# EAGLE board NQSMHS-2 (EAGLE 5.11)
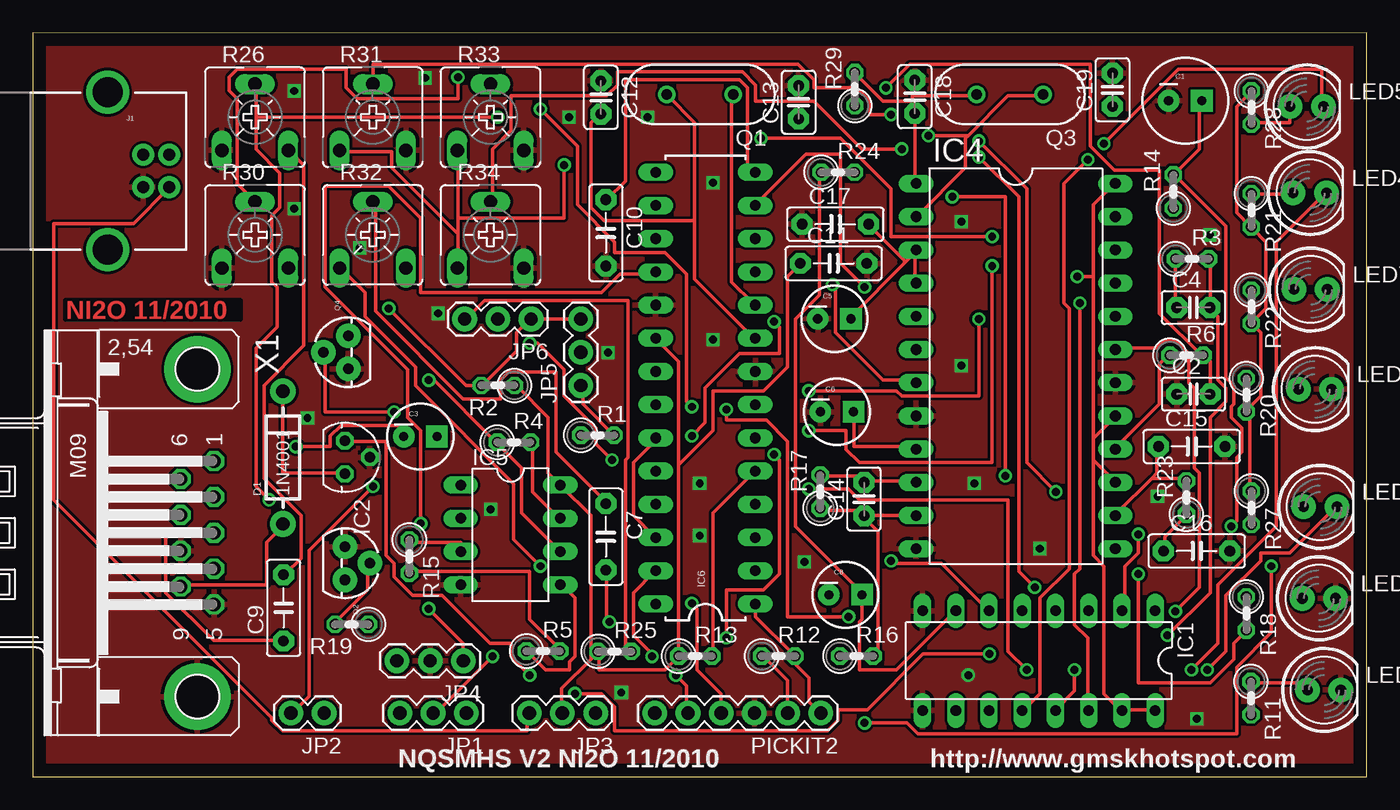
[diagram p0: board, top side]
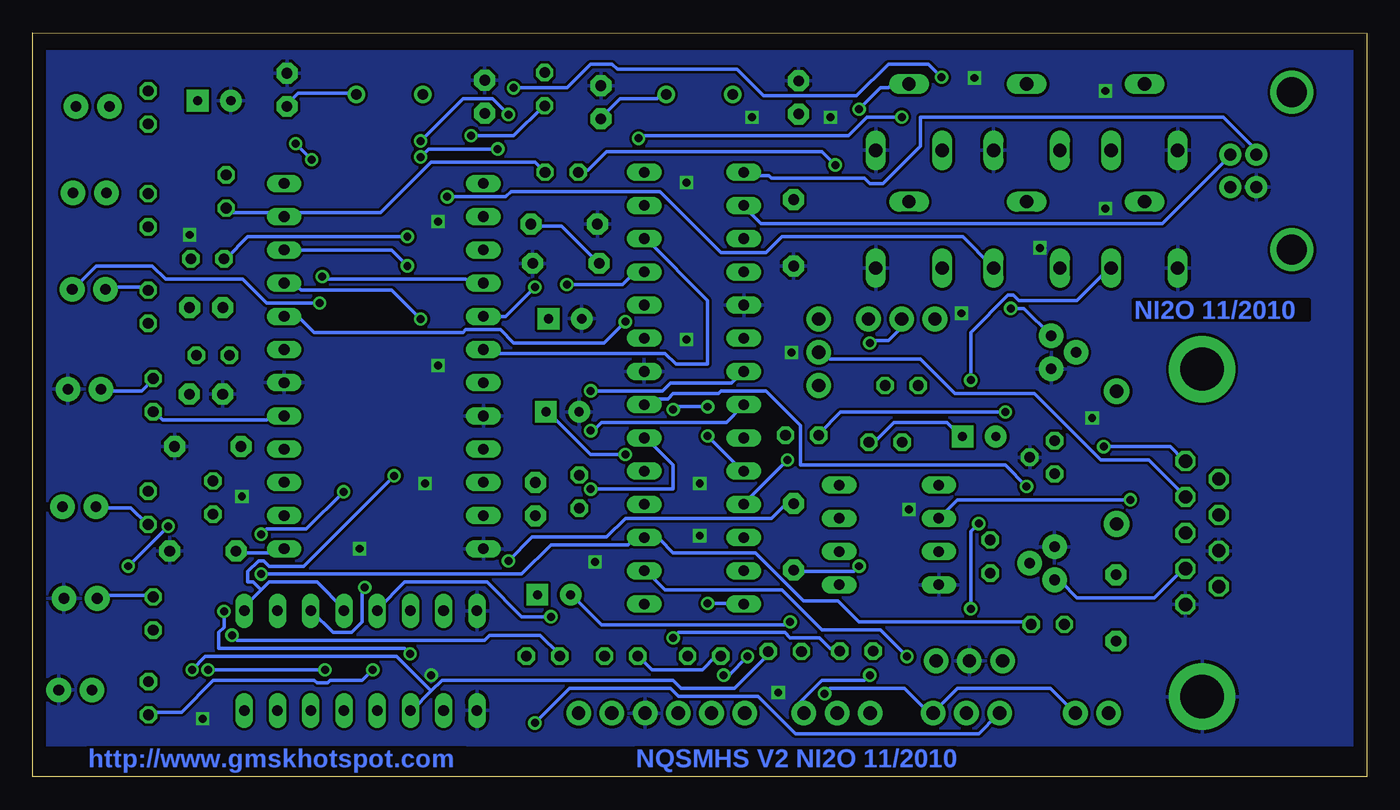
[diagram p1: board, bottom side, seen from below]

Size 102 x 56.92 mm. Coordinates in mm from the lower left corner, seen from the top.
Outline: 0,0 102,0 102,56.92 0,56.87 0,0
Copper layers (1*16): Top 0.035mm / dielectric 1.5mm / Bottom 0.035mm
Design rules "default": minimum track width 10mil, minimum drill 24mil, track to track 8mil, track to pad 8mil, pad to pad 8mil, via to via 8mil, smd to smd 8mil, copper to edge 40mil, drill to drill 8mil, minimum pad ring 10mil, minimum via ring 8mil, stop-mask expansion 4mil, vias tented up to drill 0mil, thermal gap 10mil

## Footprints (pad centres in the part's own frame; a part is rotated, then mirrored left to right if it is on the bottom)
CPOL-RADIAL-100UF-25V = drill 0.7 pad 1.651 square: 1 1.27,0 | drill 0.7 pad 1.651 round: 2 -1.27,0
C2.5-2 = drill 0.813 pad 1.6 octagon: 1 -1.27,0; 2 1.27,0
CPOL-RADIAL-10UF-25V = drill 0.7 pad 1.651 square: 1 1.27,0 | drill 0.7 pad 1.651 round: 2 -1.27,0
C5B2.5 = drill 0.813 pad 1.6 octagon: 1 -2.54,0; 2 2.54,0
DIODE-1N4001 = drill 1 pad 1.981 round: A -5.08,0; C 5.08,0
DIL16 = drill 0.813 long: 1 -8.89,-3.81; 2 -6.35,-3.81; 3 -3.81,-3.81; 4 -1.27,-3.81; 5 1.27,-3.81; 6 3.81,-3.81; 7 6.35,-3.81; 8 8.89,-3.81; 9 8.89,3.81; 10 6.35,3.81; 11 3.81,3.81; 12 1.27,3.81; 13 -1.27,3.81; 14 -3.81,3.81; 15 -6.35,3.81; 16 -8.89,3.81
78LXX = drill 0.813 octagon: GND 0,1.905; IN 1.27,0; OUT -1.27,0
DIL24-6 = drill 0.813 long: 1 -13.97,-7.62; 2 -11.43,-7.62; 3 -8.89,-7.62; 4 -6.35,-7.62; 5 -3.81,-7.62; 6 -1.27,-7.62; 7 1.27,-7.62; 8 3.81,-7.62; 9 6.35,-7.62; 10 8.89,-7.62; 11 11.43,-7.62; 12 13.97,-7.62; 13 13.97,7.62; 14 11.43,7.62; 15 8.89,7.62; 16 6.35,7.62; 17 3.81,7.62; 18 1.27,7.62; 19 -1.27,7.62; 20 -3.81,7.62; 21 -6.35,7.62; 22 -8.89,7.62; 23 -11.43,7.62; 24 -13.97,7.62
DIL08 = drill 0.813 long: 1 -3.81,-3.81; 2 -1.27,-3.81; 3 1.27,-3.81; 4 3.81,-3.81; 5 3.81,3.81; 6 1.27,3.81; 7 -1.27,3.81; 8 -3.81,3.81
DIL28-3 = drill 0.813 long: 1 -16.51,-3.81; 2 -13.97,-3.81; 3 -11.43,-3.81; 4 -8.89,-3.81; 5 -6.35,-3.81; 6 -3.81,-3.81; 7 -1.27,-3.81; 8 1.27,-3.81; 9 3.81,-3.81; 10 6.35,-3.81; 11 8.89,-3.81; 12 11.43,-3.81; 13 13.97,-3.81; 14 16.51,-3.81; 15 16.51,3.81; 16 13.97,3.81; 17 11.43,3.81; 18 8.89,3.81; 19 6.35,3.81; 20 3.81,3.81; 21 1.27,3.81; 22 -1.27,3.81; 23 -3.81,3.81; 24 -6.35,3.81; 25 -8.89,3.81; 26 -11.43,3.81; 27 -13.97,3.81; 28 -16.51,3.81
USB-B-PTH = drill 0.914 pad 1.676 round: D+ 0,1.25; D- 1.981,1.25; GND 0,-1.25; VBUS 1.981,-1.25 | drill 2.286 round: P$1 -2.718,-6.02; P$2 -2.718,6.02
1X03 = drill 1.016 pad 1.88 round: 1 0,0; 2 2.54,0; 3 5.08,0
1X02 = drill 1.016 pad 1.88 round: 1 0,0; 2 2.54,0
LED5MM = drill 0.813 pad 1.88 round: A -1.27,0; K 1.27,0
1X06 = drill 1.016 pad 1.88 round: 1 0,0; 2 2.54,0; 3 5.08,0; 4 7.62,0; 5 10.16,0; 6 12.7,0
HC49US = drill 0.813 round: 1 -2.54,0; 2 2.54,0
TO-92 = drill 0.813 pad 1.88 round: 1 -1.27,0; 2 0,1.905; 3 1.27,0
0207/2V = drill 0.813 octagon: 1 -1.27,0; 2 1.27,0
CA6V = drill 1.016 long: A -2.54,-2.54; E 2.54,-2.54; S 0,2.54
M09HP = drill 1.016 octagon: 1 -5.486,1.27; 2 -2.743,1.27; 3 0,1.27; 4 2.743,1.27; 5 5.486,1.27; 6 -4.115,-1.27; 7 -1.372,-1.27; 8 1.372,-1.27; 9 4.115,-1.27 | drill 3.302 pad 5.08 round: G1 -12.522,0; G2 12.522,0

## Placement (x,y rotation side)
C1  10uF  [CPOL-RADIAL-100UF-25V]  88.12,51.72 0 top
C2  22pF  [C2.5-2]  88.75,29.28 0 top
C3  4.7uF  [CPOL-RADIAL-10UF-25V]  29.64,26.04 0 top
C4  330p  [C2.5-2]  88.74,35.9 0 top
C5  47uF  [CPOL-RADIAL-10UF-25V]  61.29,35.04 0 top
C6  1uF  [CPOL-RADIAL-10UF-25V]  61.49,27.93 0 top
C7  0.1uF  [C5B2.5]  43.82,18.37 270 top
C8  10uF  [CPOL-RADIAL-10UF-25V]  62.14,13.93 0 top
C9  0.1uF  [C5B2.5]  19.18,12.93 90 top
C10  0.1uF  [C5B2.5]  43.82,41.61 270 top
C11  0.1uF  [C5B2.5]  61.23,39.28 0 top
C12  22pF  [C2.5-2]  43.44,51.97 270 top
C13  22pF  [C2.5-2]  58.56,51.6 90 top
C14  22pF  [C2.5-2]  63.56,21.25 90 top
C15  0.1uF  [C5B2.5]  88.61,25.28 0 top
C16  0.1uF  [C5B2.5]  88.99,17.28 0 top
C17  0.1uF  [C5B2.5]  61.37,42.28 0 top
C18  22pF  [C2.5-2]  67.44,52.02 270 top
C19  22pF  [C2.5-2]  82.56,52.55 90 top
D1  1N4001  [DIODE-1N4001]  19.13,24.42 90 top
IC1  MAX8213  [DIL16]  76.93,8.9 180 top
IC2  78L05  [78LXX]  23.87,24.45 270 top
IC4  CMX589PA4  [DIL24-6]  75.16,31.42 270 top
IC5  LM4558  [DIL08]  36.53,18.51 270 top
IC6  PIC18F2550  [DIL28-3]  51.44,29.74 90 top
J1  USBPTH  [USB-B-PTH]  8.45,46.35 0 top
JP1  SW4  [1X03]  33.15,4.88 180 top
JP2  SW3  [1X02]  22.28,4.88 180 top
JP3  SW1  [1X03]  43.04,4.88 180 top
JP4  SERIAL  [1X03]  32.93,8.88 180 top
JP5  SW5  [1X03]  41.91,29.94 90 top
JP6  SW6  [1X03]  38.1,35.02 180 top
LED1  COS  [LED5MM]  98.74,6.66 0 top
LED2  PWR  [LED5MM]  98.04,29.66 0 top
LED3  PTT  [LED5MM]  98.34,13.66 0 top
LED4  MED  [LED5MM]  97.64,44.66 0 top
LED5  LOW  [LED5MM]  97.41,51.28 0 top
LED6  DCOS  [LED5MM]  98.44,20.66 0 top
LED7  HIGH  [LED5MM]  97.71,37.28 0 top
PICKIT2  PICKIT2  [1X06]  60.26,4.88 180 top
Q1  24MHz  [HC49US]  51.02,52.2 180 top
Q2  2N3904  [TO-92]  23.87,16.34 270 top
Q3  4.9152MHz  [HC49US]  74.72,52.2 180 top
Q4  2N3904  [TO-92]  24.13,32.48 90 top
R1  4K7  [0207/2V]  43.18,26.13 0 top
R2  47K  [0207/2V]  35.56,29.94 180 top
R3  180K  [0207/2V]  88.64,39.63 0 top
R4  47K  [0207/2V]  36.79,25.6 0 top
R5  510K  [0207/2V]  39.02,9.63 0 top
R6  100K  [0207/2V]  88.22,32.25 0 top
R11  47K  [0207/2V]  93.14,6.02 270 top
R12  10K  [0207/2V]  57.01,9.25 0 top
R13  47K  [0207/2V]  50.66,9.25 0 top
R14  27K  [0207/2V]  87.21,44.77 90 top
R15  510K  [0207/2V]  28.79,16.86 270 top
R16  100K  [0207/2V]  62.98,9.25 0 top
R17  100K  [0207/2V]  60.21,21.82 90 top
R18  1K  [0207/2V]  92.79,12.5 270 top
R19  4K7  [0207/2V]  24.39,11.67 180 top
R20  1K  [0207/2V]  92.79,29.2 270 top
R21  470R  [0207/2V]  93.17,43.34 270 top
R22  470R  [0207/2V]  93.17,35.96 270 top
R23  1M  [0207/2V]  88.21,21.37 90 top
R24  27K  [0207/2V]  61.56,46.25 0 top
R25  47K  [0207/2V]  44.49,9.6 0 top
R26  500K  [CA6V]  17,50.46 0 top
R27  470R  [0207/2V]  93.17,20.58 270 top
R28  470R  [0207/2V]  93.17,51.2 270 top
R29  1M  [0207/2V]  62.86,52.6 90 top
R30  500K  [CA6V]  17,41.46 0 top
R31  100K  [CA6V]  26,50.46 0 top
R32  10K  [CA6V]  26,41.46 0 top
R33  100K  [CA6V]  35,50.46 0 top
R34  100K  [CA6V]  35,41.46 0 top
X1  DB9M  [M09HP]  12.59,18.67 270 top

## Library data of the parts
C1 C3 C5 C6 C8 D1 IC6 J1 JP1-JP6 LED1-LED7 PICKIT2 Q1-Q4 = SparkFun
C2 C4 C7 C9-C19 = capacitor-wima
IC1 IC4 = ic-package
IC2 = v-reg
IC5 = linear
R1-R6 R11-R25 R27-R29 = resistor
R26 R30-R34 = pot
X1 = con-subd

## Nets
+5V: J1.VBUS JP3.3
+12V: D1.A X1.9
ACOS: JP5.3 JP6.1 Q4.3 R2.2
COS: IC6.25 JP6.2
COS/COR/SQL: JP5.2 X1.2
DCOS: IC1.11 JP6.3 LED6.K R25.2
GND: C1.2 C2.1 C5.2 C6.2 C10.2 C11.2 C12.1 C13.2 C15.2 C16.2 C17.1 C18.1 C19.2 IC1.8 IC1.9 IC2.GND IC4.8 IC4.12 IC4.18 IC5.4 IC6.8 IC6.19 J1.GND JP4.2 LED1.K LED2.K LED3.K PICKIT2.3 Q2.1 Q4.1 R26.A R30.A R31.E R33.E R34.E X1.5 X1.8 X1.G2
N$2: D1.C IC2.IN
N$3: IC6.23 IC6.26
N$4: IC6.5 R13.2
N$5: IC6.6 R11.2
N$6: LED1.A R11.1
N$7: IC6.7 JP2.2
N$8: C1.1 JP1.3 R14.2
N$9: C12.2 IC6.9 Q1.2
N$10: C13.1 IC6.10 Q1.1
N$11: C10.1 IC6.14
N$12: IC2.OUT JP3.1
N$13: LED2.A R20.1
N$14: Q2.2 R19.2
N$15: C4.2 R3.2 R16.1
N$16: LED3.A R18.1
N$17: IC5.3 R15.1
N$18: C4.1 IC5.2 R3.1 R26.S
N$19: IC5.6 R4.1 R30.E
N$20: C9.2 R26.E
N$21: C2.2 R6.2 R30.S
N$22: C3.1 IC5.7 R4.2
N$23: C8.1 IC1.7 R24.1 R31.A R33.A R34.A
N$24: IC5.5 R5.1
N$25: C7.1 IC1.6 R32.S
N$26: C7.2 C8.2 R32.A
N$27: IC1.1 IC1.4 R32.E
N$28: IC1.14 LED7.K
N$29: LED7.A R22.1
N$30: IC1.13 LED4.K
N$31: LED4.A R21.1
N$32: IC1.12 LED5.K
N$33: IC1.2 R31.S
N$34: LED6.A R27.2
N$35: LED5.A R28.2
N$36: IC1.5 R33.S
N$37: JP5.1 R1.2
N$38: C18.2 IC4.1 Q3.2 R29.2
N$39: IC1.3 R34.S
N$40: X1.7
N$41: X1.6
N$42: C16.1 IC4.13 R23.1
N$43: C15.1 IC4.14 R23.2
N$44: Q4.2 R1.1
N$59: C19.1 IC4.2 Q3.1 R29.1
PGC: IC6.27 PICKIT2.5
PGD: IC6.28 PICKIT2.4
PLLACQ: IC4.7 IC6.11
PTT: IC6.3 R18.2 R19.1
RCFB: C14.2 IC4.10 R17.2
RX-232: IC6.18 JP4.1
RXCLOCK: IC4.21 IC6.21
RXDATA: IC4.20 IC6.24
RXDATA/SPKR: C9.1 X1.3
RXDCACQ: IC4.6 IC6.12
RXHOLD: IC4.5 IC6.13
RXSIGIN: C14.1 IC4.11 R16.2 R17.1
RXSN: IC4.23 R14.1 R24.2
TRXPTT: Q2.3 X1.4
TX-232: IC6.17
TX/SN: IC6.2 JP1.2
TXCLOCK: IC4.22 IC6.22
TXDATA: IC4.19 JP1.1 JP2.1
TXDATA/MIC: C3.2 X1.1
TXOUT: IC4.16 R6.1
USB+: IC6.16 J1.D-
USB-: IC6.15 J1.D+
VBIAS: C6.1 IC4.9 R5.2 R15.2
VCC: C5.1 C11.1 C17.2 IC1.15 IC1.16 IC4.3 IC4.4 IC4.15 IC4.17 IC4.24 IC5.8 IC6.20 JP3.2 PICKIT2.2 R2.1 R12.1 R13.1 R20.2 R21.2 R22.2 R25.1 R27.1 R28.1
VPP: IC6.1 PICKIT2.1 R12.2

## Tracks (layer width: path | path; a pad name or v marks a point on that pad's centre or on a via)
+5V
  Top 0.254: J1.VBUS 10.36,44.98 7.72,42.34 1.63,42.34 1.63,21.2 18.29,4.54 18.29,4.34 19.1,3.52 37.8,3.52 37.8,4.74 JP3.3
+12V
  Top 0.254: X1.9 11.38,14.7 17.88,14.7 17.88,17.95 19.1,19.17 D1.A
ACOS  (via drill 0.61)
  Top 0.254: v27.23,35.83 33.12,29.94 R2.2 34.34,29.94 36.98,32.58 36.98,34 38,35.02 JP6.1 JP5.3
  Bottom 0.254: v27.23,35.83 26.21,35.83 Q4.3
COS  (via drill 0.61)
  Top 0.254: v44.3,24.25 43.08,25.47 43.08,26.69 40.64,29.13 40.64,31.16 38.61,33.19 v38,33.19
  Bottom 0.254: v44.3,24.25 47.55,21 IC6.25 | v38,33.19 37.8,33.39 36.58,33.39 35.56,34.41 JP6.2
COS/COR/SQL
  Bottom 0.254: X1.2 14.02,21.61 16.66,24.25 20.32,24.25 25.4,29.33 31.5,29.33 34.14,31.97 41.05,31.97 41.45,32.38 41.86,32.38 JP5.2
DCOS  (via drill 0.61)
  Top 0.254: JP6.3 33.12,35.02 34.54,36.44 45.52,36.44 45.52,24.45 45.31,24.25 45.31,10.03 45.72,9.62 R25.2 | v89.81,8.2 91.24,9.62 91.24,13.89 93.88,16.53 93.88,17.14 96.11,17.14 99.57,20.59 LED6.K
  Bottom 0.254: 71.53,6.57 70.71,7.38 53.03,7.38 52.43,6.78 48.36,6.78 45.72,9.42 R25.2 | 71.53,6.57 72.95,5.15 IC1.11 | v89.81,8.2 88.8,9.21 74.17,9.21 71.53,6.57
GND  (via drill 0.6, 0.61)
  other vias: 71.53,7.79 52,33.46 35,20.46 77,17.46 72,22.46 71,31.46 52,45.46 89,4.46 71,42.46 51,18.46 51,22.46 90,41.46 86,21.46 59,16.46 20,52.46 21,27.46 31,35.46 44,32.46 47,50.46 30,53.46 41,50.46 20,43.46 25,40.46 45,6.46
  pour Bottom: 0,2.46 102,2.46 102,55.46 0,55.46
  pour Top: 0,0.46 102,0.46 102,56.46 0,56.46
N$2
  Top 0.254: IC2.IN 23.77,23.23 19.1,23.23 19.1,29.33 D1.C
N$3
  Top 0.254: IC6.26 47.55,18.36 45.92,19.98 45.92,24.05 47.55,25.67 47.55,25.88 IC6.23
N$4
  Top 0.254: R13.2 52.02,9.42 52.02,20.19 55.07,23.23 IC6.5
N$5  (via drill 0.61)
  Top 0.254: v59.33,22.02 62.38,22.02 63.2,21.2 74.57,21.2 74.57,9.62 v76,8.2
  Bottom 0.254: v59.33,22.02 53.03,22.02 53.03,23.84 55.07,25.88 IC6.6 | v76,8.2 76.81,7.38 79.25,7.38 79.45,7.18 80.26,7.18 80.47,7.38 88.19,7.38 90.63,4.95 93.07,4.95 R11.2
N$6
  Top 0.254: R11.1 93.27,7.18 97.33,7.18 97.33,6.78 LED1.A
N$7  (via drill 0.61)
  Top 0.254: v26.01,22.22 21.13,17.34 21.13,6.17 19.91,4.95 JP2.2
  Bottom 0.254: v26.01,22.22 27.64,23.84 43.28,23.84 43.28,26.89 45.92,29.53 49.38,29.53 49.58,29.33 53.03,29.33 53.44,28.92 54.66,28.92 55.07,28.52 IC6.7
N$8  (via drill 0.61)
  Top 0.254: C1.1 89.2,51.68 89.2,48.02 87.38,46.2 R14.2 87.38,45.99 91.24,42.13 91.24,30.55 91.85,29.94 91.85,28.52 91.64,28.31 91.64,27.5 92.46,26.69 92.46,24.86 92.05,24.45 92.05,19.58 v91.64,19.17 | v63.6,4.13 66.85,4.13 67.67,3.32 92.05,3.32 92.05,8.4 94.69,11.04 v94.69,16.12
  Bottom 0.254: v63.6,4.13 60.96,6.78 53.24,6.78 52.63,6.17 46.53,6.17 43.69,3.32 29.67,3.32 28.25,4.74 JP1.3 | v94.69,16.12 v91.64,19.17
N$9
  Top 0.254: 50.6,42.54 50.6,50.06 48.56,52.09 Q1.2 | 50.6,42.54 50.6,38.07 55.07,33.6 IC6.9 | 50.6,42.54 43.69,42.54 42.67,43.55 42.67,50.06 43.28,50.67 C12.2
N$10
  Top 0.254: IC6.10 55.07,36.24 53.44,37.87 53.44,52.09 Q1.1
  Bottom 0.254: C13.1 58.52,50.46 57.1,51.89 54.25,51.89 54.05,52.09 53.65,52.09 Q1.1
N$11
  Top 0.254: IC6.14 55.07,46.4 54.66,46.81 54.66,52.7 54.05,53.31 45.31,53.31 45.31,45.59 43.89,44.16 C10.1
N$12  (via drill 0.61)
  Top 0.254: v38,7.79 36.58,9.21 36.58,10.23 34.95,10.23 31.29,13.89 29.06,13.89 27.64,15.31 27.64,16.33 27.03,16.94 27.03,25.67 23.98,25.67 IC2.OUT
  Bottom 0.254: v38,7.79 38.41,7.38 41.66,7.38 43.28,5.76 43.28,4.95 43.08,4.95 JP3.1
N$13
  Bottom 0.254: R20.1 92.86,30.35 93.67,29.53 96.72,29.53 LED2.A
N$14
  Top 0.254: R19.2 23.16,11.86 25.6,14.29 25.6,16.33 Q2.2
N$15  (via drill 0.61)
  Top 0.254: v86.77,10.84 90.02,14.09 90.02,27.5 91.24,28.72 91.24,29.74 90.63,30.35 90.63,35.22 90.02,35.83 C4.2 90.02,36.04 90.02,39.49 R3.2
  Bottom 0.254: v86.77,10.84 86.36,10.43 67.46,10.43 67.06,10.84 63.2,10.84 61.77,9.42 R16.1
N$16
  Bottom 0.254: R18.1 92.86,13.89 96.72,13.89 96.93,13.68 LED3.A
N$17
  Top 0.254: R15.1 28.85,17.95 32.72,17.95 32.72,17.34 IC5.3
N$18  (via drill 0.61)
  Top 0.254: R3.1 87.38,39.49 87.38,36.04 C4.1 | v18.09,21.2 17.07,22.22 17.07,32.79 18.69,34.41 18.69,37.46 18.29,37.87 18.29,42.95 18.9,43.55 18.9,46.2 17.07,48.02 17.07,50.46 | 17.07,50.46 17.07,52.9 R26.S | v73.36,41.32 65.63,41.32 65.63,44.98 61.77,48.84 v55.68,48.84 | 17.07,50.46 v35.56,50.46
  Bottom 0.254: v18.09,21.2 31.29,21.2 IC5.2 | v73.36,41.32 85.55,41.32 87.17,39.69 R3.1 | v55.68,48.84 55.47,49.04 39.62,49.04 38.2,50.46 v35.56,50.46
N$19  (via drill 0.61)
  Top 0.254: IC5.6 40.23,17.34 37.39,20.19 37.39,23.64 35.56,25.47 R4.1 35.36,25.67 30.68,30.35 v30.28,30.35
  Bottom 0.254: v30.28,30.35 30.28,34 27.43,36.85 27.03,36.85 26.62,36.44 22.15,36.44 19.71,38.88 R30.E
N$20
  Top 0.254: R26.E 19.71,47.82 20.73,46.81 20.73,32.99 17.68,29.94 17.68,22.83 20.52,19.98 20.52,16.73 19.3,15.51 C9.2
N$21  (via drill 0.61)
  Top 0.254: C2.2 90.02,29.33 90.02,31.77 89.61,32.18 R6.2 89.41,32.18 86.16,35.43 86.16,46.4 82.7,46.4 80.87,48.23 80.87,54.53 67.06,54.53 v65.23,52.7 | v32.51,53.51 32.51,51.89 24.79,51.89 23.98,52.7 23.98,54.12 15.65,54.12 15.04,53.51 15.04,52.49 15.65,51.89 15.65,45.38 16.87,44.16 R30.S
  Bottom 0.254: v32.51,53.51 33.53,54.53 36.58,54.53 39.01,52.09 46.13,52.09 48.16,54.12 57.3,54.12 57.71,54.53 59.33,54.53 61.16,52.7 v65.23,52.7
N$22
  Top 0.254: IC5.7 40.23,19.78 38.2,21.81 38.2,25.47 R4.2
  Bottom 0.254: C3.1 31.09,26.08 32.11,27.1 36.17,27.1 37.59,25.67 38,25.67 R4.2
N$23  (via drill 0.61)
  Top 0.254: 32.51,42.74 32.51,47.82 R33.A | 32.51,41.52 32.51,42.74 | 32.51,41.52 32.51,39.08 R34.A | 32.51,41.52 27.43,46.6 27.43,47.82 23.57,47.82 R31.A | IC1.7 70.51,12.67 66.04,8.2 63.2,8.2 63.2,11.86 63.4,12.06 63.4,13.89 C8.1 63.4,14.09 58.32,19.17 58.32,35.02 60.15,36.85 60.15,46.2 R24.1 | 32.51,42.74 40.64,42.74 v40.64,46.81
  Bottom 0.254: v40.64,46.81 41.66,47.82 58.12,47.82 59.54,46.4 60.15,46.4 R24.1
N$24
  Top 0.254: R5.1 37.8,9.62 39.22,8.2 41.05,8.2 41.05,8.81 41.45,9.21 41.45,13.68 40.44,14.7 IC5.5
N$25  (via drill 0.61)
  Top 0.254: v65.63,16.53 65.63,16.33 69.49,16.33 72.95,12.87 IC1.6 | R32.S 26.01,43.96 26.21,43.76 26.21,35.63 32.92,28.92 35.76,28.92 35.76,30.35 36.37,30.96 40.03,30.96 40.03,24.86 43.69,21.2 43.69,21 C7.1
  Bottom 0.254: v65.63,16.53 63.8,18.36 58.12,18.36 56.69,19.78 45.52,19.78 44.5,20.8 43.89,20.8 C7.1
N$26  (via drill 0.61)
  Top 0.254: v38.81,16.12 36.78,18.15 36.78,22.42 29.26,29.94 29.26,31.36 25.4,35.22 25.4,37.05 23.57,38.88 R32.A | v44.09,11.86 43.89,12.06 43.89,15.72 C7.2
  Bottom 0.254: v38.81,16.12 39.22,15.72 43.69,15.72 C7.2 | v44.09,11.86 44.3,11.65 58.52,11.65 60.76,13.89 C8.2
N$27  (via drill 0.61)
  Top 0.254: v70.31,44.37 74.37,44.37 v74.37,23.03
  Bottom 0.254: 84.53,14.29 85.95,12.87 IC1.1 | 84.53,14.29 83.92,14.9 80.26,14.9 78.23,12.87 IC1.4 | v70.31,44.37 65.84,44.37 65.43,44.77 54.05,44.77 49.38,40.1 45.92,40.1 44.7,41.32 30.89,41.32 28.65,39.08 R32.E | v74.37,23.03 81.28,16.12 83.92,16.12 84.33,16.53 84.73,16.53 85.55,15.72 85.55,14.9 85.14,14.9 84.53,14.29
N$28  (via drill 0.61)
  Top 0.254: v80.06,36.24 80.06,15.92 79.65,15.51 79.65,11.65 80.67,10.64 80.67,5.15 IC1.14
  Bottom 0.254: v80.06,36.24 84.12,36.24 85.95,38.07 91.85,38.07 92.86,39.08 97.13,39.08 98.75,37.46 98.96,37.46 LED7.K
N$29
  Bottom 0.254: R22.1 93.27,37.26 93.47,37.46 96.32,37.46 LED7.A
N$30  (via drill 0.61)
  Top 0.254: v79.65,8.2 79.65,6.57 78.23,5.15 IC1.13 | v88.59,8.2 90.63,10.23 90.63,14.7 95.1,19.17 95.1,40.91 98.75,44.57 LED4.K
  Bottom 0.254: v79.65,8.2 v88.59,8.2
N$31
  Top 0.254: R21.1 93.27,44.57 96.32,44.57 LED4.A
N$32  (via drill 0.61)
  Top 0.254: v80.67,47.21 78.84,45.38 78.84,36.24 79.25,35.83 79.25,15.92 77.01,13.68 77.01,6.37 75.79,5.15 IC1.12 | v81.89,48.43 87.58,54.12 98.55,54.12 98.55,51.48 LED5.K
  Bottom 0.254: v80.67,47.21 v81.89,48.43
N$33  (via drill 0.61)
  Top 0.254: v84.53,18.56 84.53,17.14 83.52,16.12 83.52,13.07 83.31,12.87 IC1.2 | v78.23,21.81 76,24.05 76,44.98 v72.34,48.63 | v65.63,50.67 64.01,50.67 64.01,51.68 62.99,52.7 59.74,52.7 59.74,53.31 58.52,54.53 26.01,54.53 26.01,53.11 R31.S
  Bottom 0.254: v84.53,18.56 84.12,18.97 81.08,18.97 v78.23,21.81 | v72.34,48.63 69.09,51.89 66.85,51.89 v65.63,50.67
N$34
  Bottom 0.254: R27.2 93.27,19.37 94.49,20.59 97.13,20.59 LED6.A
N$35
  Top 0.254: R28.2 93.27,50.06 96.11,50.06 96.11,51.28 LED5.A
N$36  (via drill 0.61)
  Top 0.254: v62.38,12.26 57.71,12.26 57.71,25.67 56.08,27.3 53.03,27.3 v53.03,28.11 | v50.39,28.31 49.99,28.72 49.99,38.47 48.36,40.1 44.5,40.1 44.5,40.91 41.66,43.76 41.66,48.23 v38.81,51.07
  Bottom 0.254: v62.38,12.26 64.62,12.26 67.26,14.9 73.56,14.9 75.59,12.87 IC1.5 | v53.03,28.11 52.83,28.31 v50.39,28.31 | v38.81,51.07 37.19,52.7 36.58,52.7 36.37,52.9 35.15,52.9 R33.S
N$37
  Top 0.254: R1.2 42.06,28.52 42.06,29.94 JP5.1
N$38
  Top 0.254: 67.26,51.68 65.02,51.68 62.99,53.71 R29.2 | 67.26,51.68 67.26,50.87 C18.2 67.46,50.67 67.46,45.59 IC4.1 | 67.26,51.68 67.26,52.09 72.14,52.09 Q3.2
N$39  (via drill 0.61)
  Top 0.254: v76.61,14.5 75.39,15.72 75.39,44.37 v72.34,47.41 | v66.45,48.02 63.4,48.02 59.74,51.68 55.27,51.68 55.27,52.9 54.25,53.92 44.7,53.92 44.7,52.9 43.89,52.09 36.58,52.09 36.58,49.45 35.15,48.02 35.15,44.16 R34.S
  Bottom 0.254: v76.61,14.5 76.81,14.5 76.81,11.86 77.62,11.04 79.05,11.04 80.67,12.67 IC1.3 | v72.34,47.41 71.73,48.02 v66.45,48.02
N$42
  Top 0.254: R23.1 88.19,19.98 86.56,18.36 86.56,17.34 C16.1
  Bottom 0.254: IC4.13 82.91,17.34 83.11,17.14 86.36,17.14 C16.1
N$43
  Top 0.254: 85.55,22.83 85.95,23.23 85.95,25.27 C15.1 | 85.55,22.83 82.91,20.19 IC4.14 | 85.55,22.83 88.19,22.83 R23.2
N$44  (via drill 0.61)
  Top 0.254: v27.64,27.91 22.35,27.91 22.35,32.38 Q4.2
  Bottom 0.254: v27.64,27.91 40.23,27.91 41.86,26.28 R1.1
N$59  (via drill 0.61)
  Top 0.254: 71.53,49.04 74.57,52.09 77.22,52.09 Q3.1 | 71.53,49.04 71.32,48.84 71.32,46.6 67.67,42.95 IC4.2 | 71.53,49.04 v68.48,49.04
  Bottom 0.254: v68.48,49.04 65.23,49.04 62.99,51.28 R29.1 | C19.1 82.5,51.48 81.69,52.29 77.42,52.29 Q3.1
PGC  (via drill 0.61)
  Top 0.254: v47.35,9.21 47.35,9.42 45.92,10.84 45.92,14.09 47.55,15.72 IC6.27 | v49.17,7.79 49.99,6.98 49.99,4.95 PICKIT2.5
  Bottom 0.254: v47.35,9.21 48.77,7.79 v49.17,7.79
PGD  (via drill 0.61)
  Top 0.254: v50.39,13.28 50.8,12.87 50.8,8.2 52.63,6.37 52.63,4.95 PICKIT2.4
  Bottom 0.254: v50.39,13.28 47.75,13.28 IC6.28
PLLACQ  (via drill 0.61)
  Top 0.254: v61.16,37.66 61.37,37.46 61.37,34 65.02,30.35 67.46,30.35 IC4.7
  Bottom 0.254: v61.16,37.66 56.9,37.66 56.29,38.27 55.47,38.27 55.27,38.47 IC6.11
PTT  (via drill 0.61)
  Top 0.254: v84.53,15.51 84.53,7.18 90.02,7.18 91.85,9.01 91.85,10.23 92.66,11.04 R18.2
  Bottom 0.254: R19.1 25.81,11.86 38.81,11.86 40.44,13.48 43.08,13.48 46.74,17.14 53.03,17.14 54.05,18.15 55.07,18.15 IC6.3 55.27,18.15 56.08,18.15 56.49,17.75 62.38,17.75 64.62,15.51 v84.53,15.51
RCFB
  Top 0.254: R17.2 60.35,23.03 63.4,23.03 63.4,22.62 C14.2 63.6,22.62 67.46,22.62 IC4.10
RX-232  (via drill 0.61)
  Top 0.254: v29.67,19.37 29.67,26.49 28.65,27.5 28.65,31.16 22.35,37.46 22.35,45.18 27.23,45.18 29.67,42.74 29.67,37.05 43.48,37.05 44.91,38.47 47.55,38.47 IC6.18 | v30.28,12.87 32.92,10.23 32.92,9.01 JP4.1
  Bottom 0.254: v29.67,19.37 30.28,18.76 v30.28,12.87
RXCLOCK  (via drill 0.61)
  Top 0.254: v59.33,29.53 66.04,29.53 66.45,29.13 72.34,29.13 v72.34,35.02
  Bottom 0.254: v59.33,29.53 53.85,29.53 53.24,30.14 48.56,30.14 47.75,30.96 IC6.21 | v72.34,35.02 74.57,37.26 81.48,37.26 81.89,37.66 82.7,37.66 IC4.21
RXDATA  (via drill 0.61)
  Top 0.254: v50.39,26.08 51.41,27.1 51.41,29.74 54.05,32.38 57.1,32.38 57.1,34.41 v56.69,34.82
  Bottom 0.254: v50.39,26.08 47.75,23.44 IC6.24 | v56.69,34.82 58.32,33.19 65.23,33.19 66.24,34.21 68.89,34.21 69.09,34 80.47,34 81.69,35.22 82.7,35.22 IC4.20
RXDATA/SPKR
  Top 0.254: X1.3 13.82,18.56 10.16,18.56 10.16,14.09 13.82,10.43 19.1,10.43 C9.1
RXDCACQ
  Bottom 0.254: IC6.12 55.07,41.12 50.39,36.44 50.39,31.57 52.83,31.57 53.65,32.38 67.26,32.38 67.46,32.58 IC4.6
RXHOLD  (via drill 0.61)
  Top 0.254: v63.6,37.46 61.77,39.29 61.77,47.62 59.13,47.62 55.27,43.76 IC6.13
  Bottom 0.254: v63.6,37.46 65.84,35.22 67.46,35.22 IC4.5
RXSIGIN
  Top 0.254: R16.2 64.41,9.42 64.62,9.62 64.62,18.76 63.6,19.78 C14.1 | IC4.11 67.46,19.98 63.6,19.98 C14.1 | R17.1 60.35,20.39 63.4,20.39 63.4,19.98 C14.1
RXSN
  Bottom 0.254: 82.5,43.15 75.39,43.15 71.53,47.01 63.6,47.01 62.99,46.4 R24.2 | 82.5,43.15 82.7,42.95 IC4.23 82.5,43.15 | 82.5,43.15 86.97,43.15 87.17,43.35 R14.1
TRXPTT
  Bottom 0.254: X1.4 14.02,15.92 16.26,13.68 22.15,13.68 23.37,14.9 23.77,14.9 Q2.3
TX/SN  (via drill 0.61)
  Top 0.254: v35.15,9.21 30.68,4.74 JP1.2
  Bottom 0.254: v35.15,9.21 37.19,11.25 41.66,11.25 44.7,14.29 53.65,14.29 55.07,15.72 IC6.2
TXCLOCK  (via drill 0.61)
  Top 0.254: v59.33,26.49 62.18,26.49 62.18,25.06 63.2,24.05 73.36,24.05 v73.36,39.08
  Bottom 0.254: v59.33,26.49 59.13,26.49 58.52,27.1 48.97,27.1 47.75,28.31 IC6.22 | v73.36,39.08 74.57,40.3 82.7,40.3 IC4.22
TXDATA  (via drill 0.61)
  Top 0.254: v87.38,12.67 89.2,14.5 89.2,23.23 88.8,23.64 88.8,29.74 88.39,30.14 88.39,32.38 87.38,33.39 86.56,33.39 85.95,32.79 82.91,32.79 IC4.19 | v73.15,9.42 68.07,9.42 63.8,5.15 61.57,5.15 61.57,4.34 60.76,3.52 44.5,3.52 44.5,5.35 43.48,6.37 v41.45,6.37
  Bottom 0.254: v87.38,12.67 87.38,11.45 87.78,11.04 87.78,9.82 73.56,9.82 v73.15,9.42 | v41.45,6.37 41.05,6.78 35.36,6.78 33.53,4.95 33.33,4.95 JP1.1 33.12,4.95 31.29,6.78 24.18,6.78 22.35,4.95 JP2.1
TXDATA/MIC  (via drill 0.61)
  Top 0.254: v20.12,25.27 22.76,25.27 22.76,26.08 23.57,26.89 28.25,26.89 28.25,26.08 C3.2
  Bottom 0.254: v20.12,25.27 15.04,25.27 14.02,24.25 X1.1
TXOUT
  Top 0.254: IC4.16 82.91,25.27 86.16,28.52 86.16,31.57 86.77,32.18 R6.1
USB+
  Bottom 0.254: IC6.16 47.55,43.55 46.33,42.34 15.65,42.34 10.57,47.41 J1.D-
USB-
  Bottom 0.254: IC6.15 47.55,46.2 47.35,45.99 45.72,45.99 45.52,45.79 38.41,45.79 38,45.38 36.98,45.38 34.14,48.23 34.14,50.46 10.97,50.46 8.53,48.02 8.53,47.62 J1.D+
VBIAS  (via drill 0.61)
  Top 0.254: IC4.9 67.46,25.27 62.79,25.27 62.79,27.91 C6.1 | R15.2 28.85,15.72 38,15.72 38,12.06 40.23,9.82 R5.2 | v56.69,24.66 57.1,24.25 57.1,15.51 55.88,14.29 53.03,14.29 v53.03,10.64
  Bottom 0.254: v56.69,24.66 59.33,24.66 62.59,27.91 C6.1 | v53.03,10.64 52.63,11.04 44.5,11.04 44.09,10.64 41.86,10.64 41.05,9.82 40.44,9.82 R5.2
VCC  (via drill 0.61)
  Top 0.254: R27.1 93.07,22.02 93.07,27.71 92.86,27.91 R20.2 92.86,28.11 93.88,29.13 93.88,34 93.27,34.61 R22.2 93.27,34.82 94.28,35.83 94.28,40.91 93.27,41.93 R21.2 93.07,42.13 92.05,43.15 92.05,51.28 93.07,52.29 R28.1 | IC1.16 85.75,5.15 83.31,5.15 IC1.15 83.11,5.15 81.89,6.37 81.89,16.12 81.08,16.94 81.08,24.25 | 81.08,24.25 82.7,22.62 IC4.15 | 81.08,25.88 81.08,24.25 | 81.08,25.88 82.7,27.5 IC4.17 | 81.08,38.27 81.08,25.88 | 81.08,38.27 81.08,43.76 82.7,45.38 IC4.24 | 67.46,40.1 67.46,40.3 IC4.3 67.46,40.1 | 67.46,40.1 67.46,37.87 IC4.4 | 66.65,39.29 67.46,40.1 | 66.65,39.29 62.59,35.22 C5.1 | 66.65,39.29 66.65,39.49 64.01,42.13 C17.2 | R2.1 36.98,29.94 39.42,27.5 39.42,23.23 40.23,22.42 IC5.8 40.44,22.22 42.67,19.98 42.67,9.01 | R12.1 55.88,9.21 57.71,7.38 57.71,4.95 PICKIT2.2 | 49.38,23.84 49.38,9.42 R13.1 49.38,9.21 48.36,8.2 43.28,8.2 43.28,9.42 R25.1 43.08,9.42 42.67,9.01 | 49.38,23.84 49.38,31.77 47.75,33.39 IC6.20 | 42.67,9.01 40.44,6.78 40.44,4.95 JP3.2 | 49.38,23.84 52.02,26.49 52.02,29.53 55.88,29.53 57.71,31.36 57.71,38.27 58.52,39.08 C11.1 | v79.86,38.27 81.08,38.27
  Bottom 0.254: R20.2 92.66,27.91 92.05,27.3 84.12,27.3 83.92,27.5 82.91,27.5 IC4.17 | C11.1 58.73,39.29 61.57,42.13 63.8,42.13 C17.2 | R12.1 55.68,9.21 54.66,8.2 50.8,8.2 49.78,9.21 49.58,9.21 R13.1 | v79.86,38.27 79.65,38.07 68.89,38.07 68.68,37.87 67.67,37.87 IC4.4
VPP
  Top 0.254: IC6.1 55.27,13.07 55.27,12.26 58.12,9.42 R12.2 58.32,9.21 58.32,8.6 59.33,7.59 59.33,5.76 60.15,4.95 PICKIT2.1

## Text on the board
Top: NI2O 11/2010
Bottom: NI2O 11/2010 | NQSMHS V2 NI2O 11/2010 | http://www.gmskhotspot.com
tPlace: NQSMHS V2 NI2O 11/2010 | http://www.gmskhotspot.com